# EAGLE board xmega-128a4u-switch (EAGLE 8.3.2)
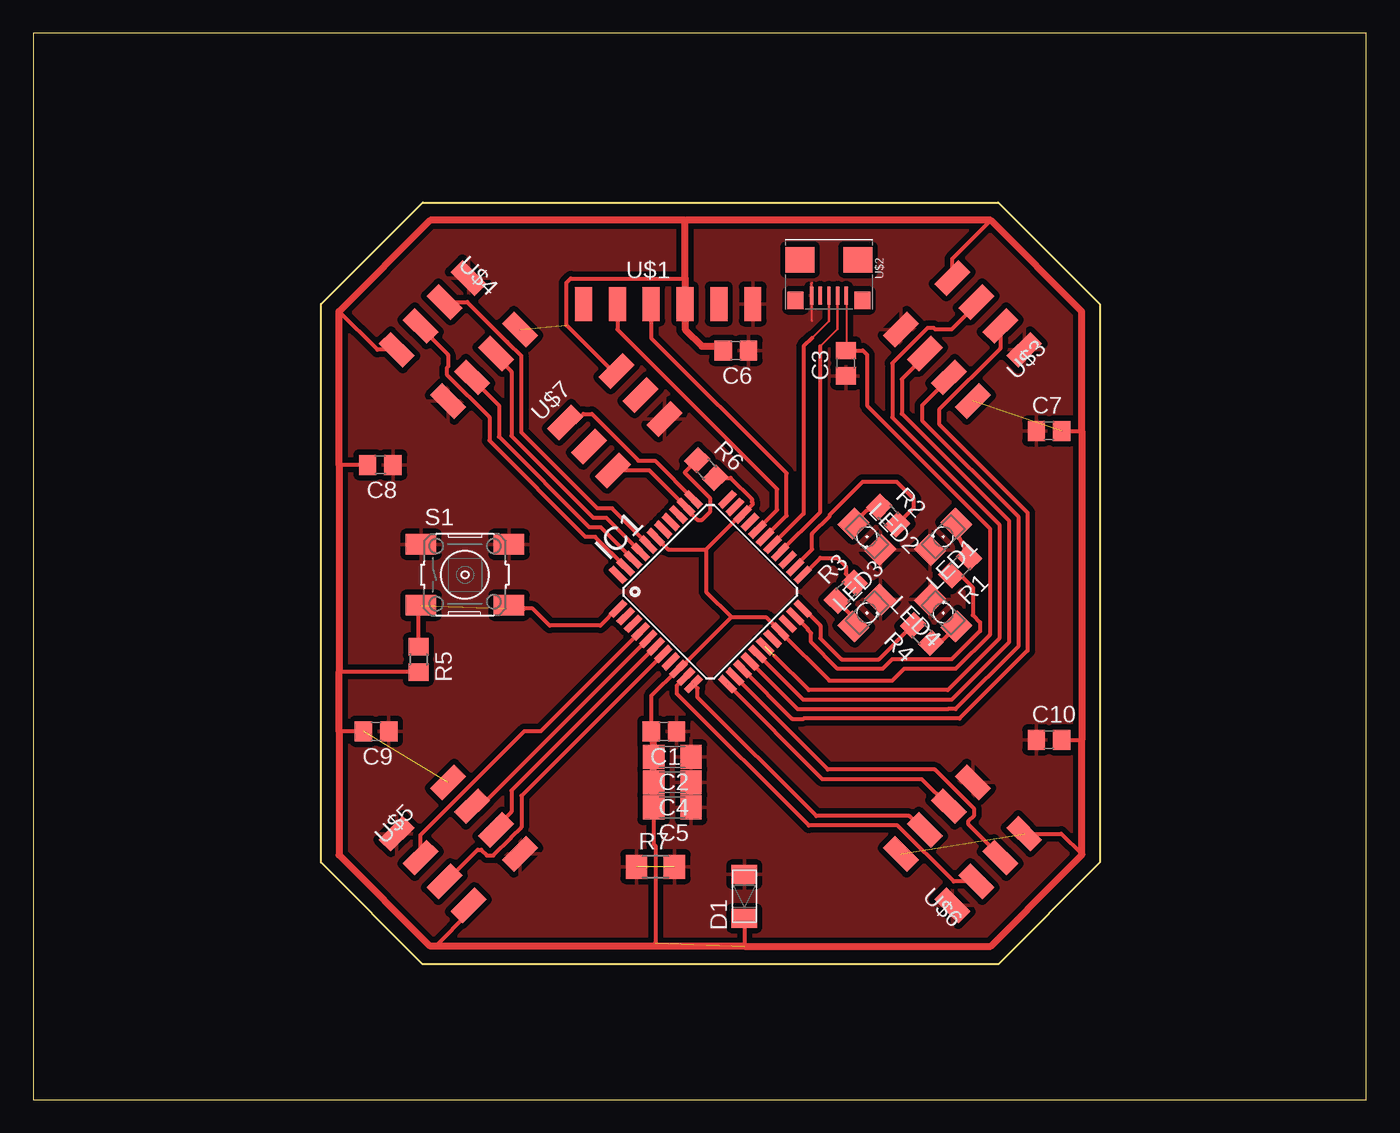
[diagram p0: board, top side]
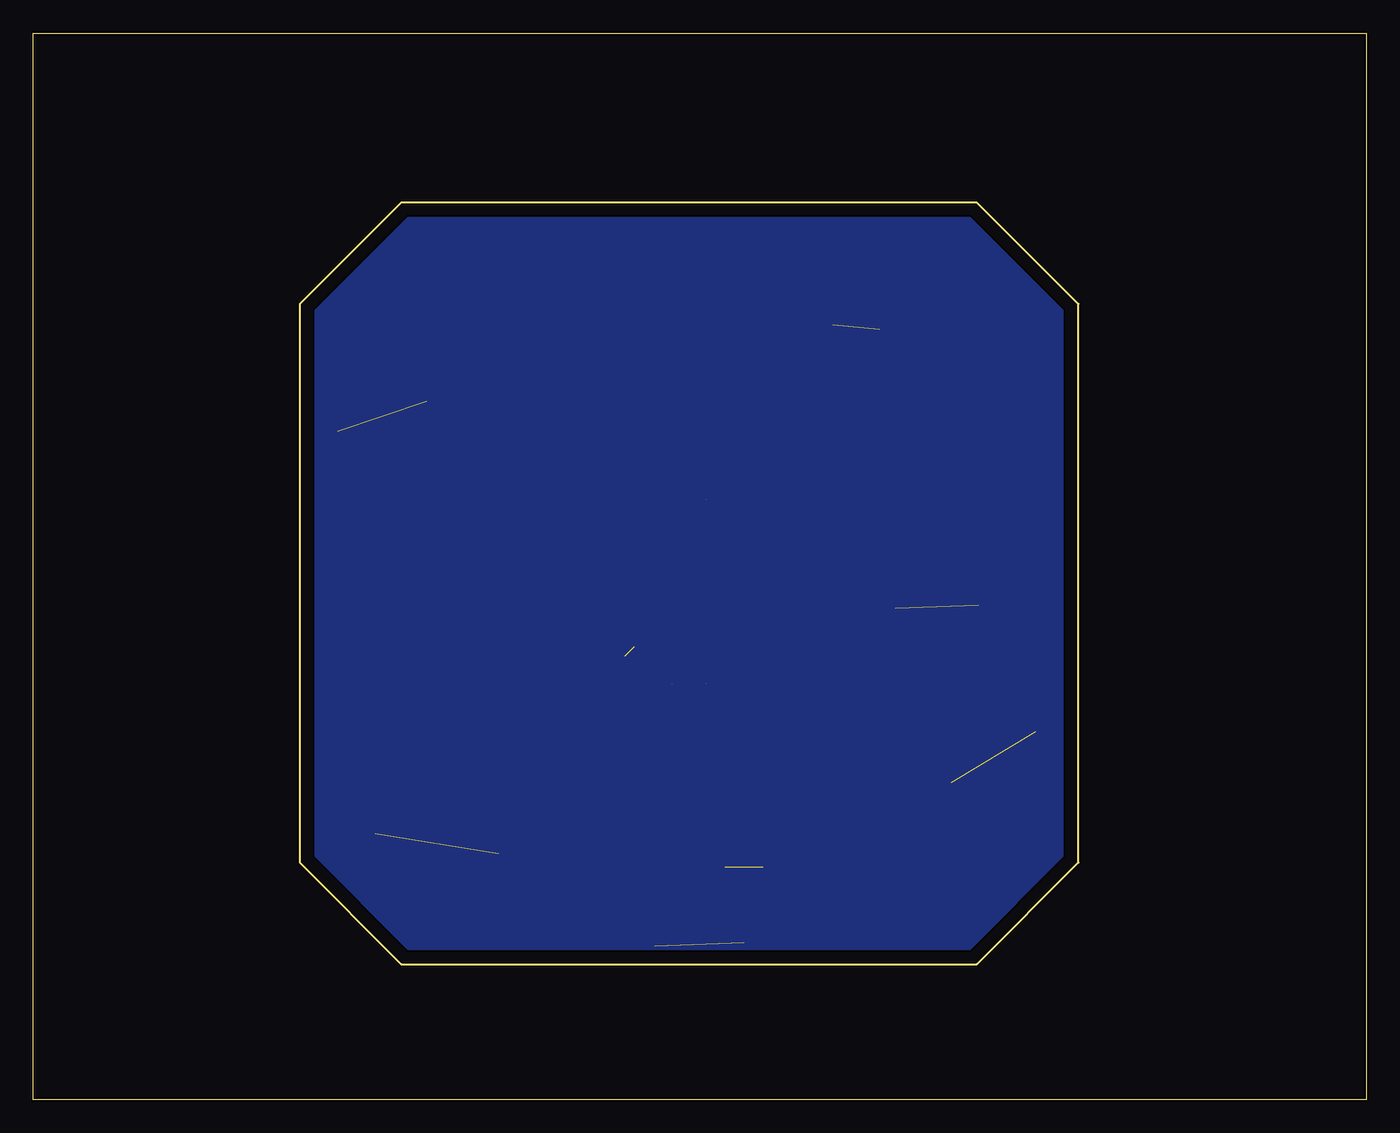
[diagram p1: board, bottom side, seen from below]

Size 100 x 80 mm. Coordinates in mm from the lower left corner, seen from the top.
Outline: 0,0 100,0 100,80 0,80 0,0
Outline: 21.59,59.69 29.21,67.31 72.39,67.31 80.01,59.69 80.01,17.78 72.39,10.16 29.21,10.16 21.59,17.78 21.59,59.69
Copper layers (1*16): Top 0.035mm / dielectric 1.5mm / Bottom 0.035mm
Design rules "default *": minimum track width 10mil, minimum drill 32mil, track to track 16mil, track to pad 16mil, pad to pad 16mil, via to via 16mil, smd to smd 16mil, copper to edge 40mil, drill to drill 16mil, minimum pad ring 10mil, minimum via ring 8mil, stop-mask expansion 4mil, vias tented up to drill 0mil, thermal gap 16mil

## Footprints (pad centres in the part's own frame; a part is rotated, then mirrored left to right if it is on the bottom)
C0805 = smd 1.3 x 1.5: 1 -0.95,0; 2 0.95,0
C1206 = smd 1.6 x 1.8: 1 -1.4,0; 2 1.4,0
MINI-SMA = smd 1.4 x 1.9: ANODE 1.65,0; KATHODE -1.65,0
TQFP44 = smd 1.5 x 0.5: 1 -5.8,4; 2 -5.8,3.2; 3 -5.8,2.4; 4 -5.8,1.6; 5 -5.8,0.8; 6 -5.8,0; 7 -5.8,-0.8; 8 -5.8,-1.6; 9 -5.8,-2.4; 10 -5.8,-3.2; 11 -5.8,-4; 23 5.8,-4; 24 5.8,-3.2; 25 5.8,-2.4; 26 5.8,-1.6; 27 5.8,-0.8; 28 5.8,0; 29 5.8,0.8; 30 5.8,1.6; 31 5.8,2.4; 32 5.8,3.2; 33 5.8,4 | smd 0.5 x 1.5: 12 -4,-5.8; 13 -3.2,-5.8; 14 -2.4,-5.8; 15 -1.6,-5.8; 16 -0.8,-5.8; 17 0,-5.8; 18 0.8,-5.8; 19 1.6,-5.8; 20 2.4,-5.8; 21 3.2,-5.8; 22 4,-5.8; 34 4,5.8; 35 3.2,5.8; 36 2.4,5.8; 37 1.6,5.8; 38 0.8,5.8; 39 0,5.8; 40 -0.8,5.8; 41 -1.6,5.8; 42 -2.4,5.8; 43 -3.2,5.8; 44 -4,5.8
LED_1206 = smd 1.6 x 1.803: A -1.422,0; C 1.422,0
R0805 = smd 1.3 x 1.5: 1 -0.95,0; 2 0.95,0
R1206 = smd 1.6 x 1.803: 1 -1.422,0; 2 1.422,0
6MM_SWITCH = smd 2.286 x 1.524: 1 -3.302,2.286; 2 3.302,2.286; 3 -3.302,-2.286; 4 3.302,-2.286
1X06SMD = smd 2.54 x 1.27: 1 0,6.35; 2 0,3.81; 3 0,1.27; 4 0,-1.27; 5 0,-3.81; 6 0,-6.35
DX4R005HJ5_64 = smd 0.254 x 1.35: D+ 0,1.6; D- -0.65,1.6; GND 1.3,1.6; ID 0.65,1.6; VBUS -1.3,1.6 | smd 1.2 x 1.3: GND@1 -2.5,1.95; GND@2 2.5,1.95 | smd 2.15 x 1.9: GND@3 -2.175,-1.1; GND@4 2.175,-1.1
2X04SMD = smd 2.54 x 1.27: 1 -2.54,3.81; 2 2.92,3.81; 3 -2.54,1.27; 4 2.92,1.27; 5 -2.54,-1.27; 6 2.92,-1.27; 7 -2.54,-3.81; 8 2.92,-3.81
2X03SMD = smd 2.54 x 1.27: 1 -2.54,2.54; 2 2.92,2.54; 3 -2.54,0; 4 2.92,0; 5 -2.54,-2.54; 6 2.92,-2.54

## Placement (x,y rotation side)
C1  0.1uF  [C0805]  47.31,27.62 180 top
C2  10uF  [C1206]  47.94,25.72 180 top
C3  1uF  [C0805]  60.96,55.24 90 top
C4  10uF  [C1206]  47.94,23.81 180 top
C5  10uF  [C1206]  47.94,21.91 180 top
C6  1uF  [C0805]  52.7,56.2 180 top
C7  1uF  [C0805]  76.2,50.16 0 top
C8  1uF  [C0805]  26.04,47.62 180 top
C9  1uF  [C0805]  25.72,27.62 180 top
C10  1uF  [C0805]  76.2,26.99 0 top
D1  CDBM1100-G  [MINI-SMA]  53.34,15.24 90 top
IC1  XMEGA16A4A  [TQFP44]  50.8,38.1 45 top
LED1  [LED_1206]  68.26,42.23 225 top
LED2  [LED_1206]  62.55,42.23 315 top
LED3  [LED_1206]  62.55,36.51 45 top
LED4  [LED_1206]  68.26,36.51 135 top
R1  2k2  [R0805]  69.53,40.01 225 top
R2  2k2  [R0805]  64.14,43.81 315 top
R3  2k2  [R0805]  60.96,38.1 45 top
R4  2k2  [R0805]  66.67,34.92 135 top
R5  15k  [R0805]  28.89,33.02 270 top
R6  15k  [R0805]  50.48,47.31 315 top
R7  0R  [R1206]  46.67,17.46 0 top
S1  [6MM_SWITCH]  32.38,39.37 0 top
U$1  FTDI-SMD-HEADER  [1X06SMD]  47.62,59.69 270 top
U$2  MICRO-USB_1/64  [DX4R005HJ5_64]  59.69,61.91 180 top
U$3  NETPORT_IDC_FULLFLIP  [2X04SMD]  69.85,57.15 225 top
U$4  NETPORT_IDC_FULLFLIP  [2X04SMD]  31.75,57.15 315 top
U$5  NETPORT_IDC_FULLFLIP  [2X04SMD]  31.75,19.05 45 top
U$6  NETPORT_IDC_FULLFLIP  [2X04SMD]  69.85,19.05 135 top
U$7  PDI  [2X03SMD]  43.5,50.8 45 top

## Library data of the parts
C1-C10 = eagle-ltspice; SPICEMODEL: NONE; SPICEPREFIX: C
D1 S1 U$1-U$7 = fab
IC1 = atmel; OC_FARNELL: unknown; OC_NEWARK: unknown
LED1-LED4 = eagle-ltspice; SPICEMODEL: NONE; SPICEPREFIX: D; SPICETYPE: diode
R1-R7 = eagle-ltspice; SPICEMODEL: NONE; SPICEPREFIX: R

## Nets
+3V3: C1.2 C2.2 C3.2 C4.2 C5.2 C6.2 C7.2 C8.2 C9.2 C10.2 D1.KATHODE IC1.9 IC1.19 IC1.31 IC1.39 R5.2 R6.2 U$1.3 U$2.VBUS U$3.2 U$3.7 U$4.2 U$4.7 U$5.2 U$5.7 U$6.2 U$6.7 U$7.2
D+: IC1.27 U$2.D+
D-: IC1.26 U$2.D-
GND: C1.1 C2.1 C3.1 C4.1 C5.1 C6.1 C7.1 C8.1 C9.1 C10.1 D1.ANODE IC1.8 IC1.18 IC1.30 IC1.38 LED1.C LED2.C LED3.C LED4.C R7.1 R7.2 S1.1 S1.2 U$1.1 U$2.GND U$3.1 U$3.8 U$4.1 U$4.8 U$5.1 U$5.8 U$6.1 U$6.8 U$7.6
N$1: LED4.A R4.1
N$2: LED3.A R3.1
N$3: LED2.A R2.1
N$4: LED1.A R1.1
N$5: IC1.35 R6.1 U$7.5
N$6: IC1.34 U$7.1
N$7: IC1.1 R5.1 S1.3 S1.4
NP1_STAT: IC1.21 R1.2
NP1BI: IC1.14 U$3.3
NP1BO: IC1.16 U$3.6
NP1TI: IC1.17 U$3.5
NP1TO: IC1.15 U$3.4
NP2_STAT: IC1.24 R2.2
NP2BI: IC1.40 U$4.3
NP2BO: IC1.42 U$4.6
NP2TI: IC1.43 U$4.5
NP2TO: IC1.41 U$4.4
NP3_STAT: IC1.23 R3.2
NP3BI: IC1.4 U$5.3
NP3BO: IC1.6 U$5.6
NP3TI: IC1.7 U$5.5
NP3TO: IC1.5 U$5.4
NP4_STAT: IC1.22 R4.2
NP4BI: IC1.10 U$6.3
NP4BO: IC1.12 U$6.6
NP4TI: IC1.13 U$6.5
NP4TO: IC1.11 U$6.4
RX: IC1.28 U$1.4
TX: IC1.29 U$1.5

## Tracks (layer width: path | path; a pad name or v marks a point on that pad's centre or on a via)
+3V3  (5 unrouted)
  Top 0.152: U$2.VBUS 60.99,56.23 C3.2
  Top 0.305: C1.2 46.36,30.26 IC1.9 48.49,32.3 52.39,36.2 | 52.39,36.2 54.97,36.2 IC1.19 59.73,31.43 64.45,31.43 65.33,32.31 69.19,32.31 71.75,34.87 71.75,42.86 62.55,52.07 62.55,55.88 62.23,56.2 C3.2 | 50.48,41.27 53.11,43.9 IC1.31 53.98,44.67 53.98,44.77 53.9,44.84 53.9,45.05 52.32,46.64 R6.2 | 50.48,41.27 47.62,41.27 IC1.39 | 50.48,41.27 50.48,38.1 52.39,36.2 | R5.2 22.94,32.07 | 48.9,61.59 40.32,61.59 40.01,61.28 40.01,58.1 43.45,54.66 U$7.2 | C10.2 78.66,26.99 | U$6.7 77.13,19.95 78.66,18.41 | U$3.7 68.95,63.09 71.83,65.96 | U$4.7 25.82,56.25 22.94,59.13 | C8.2 22.94,47.62 | U$5.7 32.65,13.99 30.16,11.51 | C9.2 22.94,27.62 | C7.2 78.66,50.16 | C5.2 46.54,19.18 46.67,19.05 46.67,11.77 | D1.KATHODE 53.34,11.51
  Top 0.508: 48.97,65.96 71.83,65.96 78.66,59.13 78.66,50.16 78.66,26.99 78.66,18.41 78.66,18.34 74.61,14.29 71.83,11.51 53.34,11.51 30.16,11.51 29.77,11.51 22.94,18.34 22.94,27.62 22.94,32.07 22.94,47.62 22.94,59.13 29.77,65.96 48.9,65.96 48.9,61.59 U$1.3 48.9,57.78 50.16,56.52 51.44,56.52 C6.2 | C5.2 C4.2 C2.2 46.54,27.44 C1.2
D+
  Top 0.203: U$2.D+ 59.69,58.42 58.42,57.15
  Top 0.305: 58.42,57.15 57.78,56.52 57.78,43.95 IC1.27
D-
  Top 0.203: U$2.D- 60.34,57.8 59.05,56.52
  Top 0.305: 59.05,56.52 59.05,44.09 IC1.26
GND  (1 unrouted)
  Top 0.152: U$2.GND 58.39,60.3 58.42,60.33 | U$2.GND 58.39,58.45 58.42,58.42 | U$2.GND 58.39,61.25 58.42,61.28
  pour Top (isolate 0.406): 21.59,59.69 29.21,67.31 72.39,67.31 80.01,59.69 80.01,17.78 72.39,10.16 29.21,10.16 21.59,17.78
N$1
  Top 0.305: R4.1 68.33,34.57 LED4.A
N$2
  Top 0.305: LED3.A 61.54,36.17 R3.1
N$3
  Top 0.305: R2.1 62.48,44.17 LED2.A
N$4
  Top 0.305: LED1.A 69.27,42.56 R1.1
N$5
  Top 0.305: R6.1 48.9,47.06 48.9,46.99 50.8,45.09 50.8,44.13 50.16,43.5 49.85,43.5 48.96,44.38 IC1.35 46.22,47.21 U$7.5
N$6  (1 unrouted)
  Top 0.305: U$7.1 40.64,50.8 41.27,51.44 41.91,51.44 45.4,47.94 46.63,47.94 IC1.34
N$7  (1 unrouted)
  Top 0.305: IC1.1 43.81,36.83 42.55,35.56 38.73,35.56 37.47,36.83 36.83,36.83 36.2,37.47 36.07,37.47 S1.4 35.31,36.83 | R5.1 28.89,36.89 S1.3
N$8
  pour Bottom: 21.59,59.69 29.21,67.31 72.39,67.31 80.01,59.69 80.01,17.78 72.39,10.16 29.21,10.16 21.59,17.78
NP1_STAT
  Top 0.305: R1.2 68.86,40.04 70.48,38.42 70.48,36.35 71.03,35.81 71.03,35.15 68.9,33.02 64.43,33.02 63.72,32.31 60.35,32.31 58.34,34.31 58.34,35 58.1,35.24 58.1,35.32 IC1.21
NP1BI
  Top 0.305: U$3.3 72.54,56.35 67.94,51.75 67.94,50.7 74.6,44.04 74.6,33.69 69.49,28.59 57.8,28.59 57.78,28.57 56.93,28.57 IC1.14
NP1BO
  Top 0.305: U$3.6 66.89,55.77 65.16,54.05 65.16,51.47 73.18,43.45 73.18,34.28 68.91,30.01 57.76,30.01 IC1.16
NP1TI  (1 unrouted)
  Top 0.305: 55.6,33.3 58.18,30.72 68.61,30.72 72.47,34.58 72.47,43.16 64.45,51.17 64.45,55.24 67.1,57.89 67.57,57.89 67.67,57.78 68.9,57.78 70.75,59.64 U$3.5
NP1TO
  Top 0.305: U$3.4 68.68,54.08 66.67,52.07 66.67,50.96 73.89,43.75 73.89,33.99 69.2,29.3 68.61,29.3 | 68.61,29.3 | 68.61,29.3 57.34,29.3 IC1.15
NP2_STAT
  Top 0.305: IC1.24 57.16,40.02 58.42,41.27 58.42,42.45 59.77,43.8 59.77,43.89 62.23,46.35 64.77,46.35 66.04,45.09 66.04,44.38 R2.2
NP2BI
  Top 0.305: U$4.3 32.55,59.84 35.56,56.83 35.56,56.82 36.62,55.77 36.62,50.06 42.33,44.35 43.42,44.35 IC1.40
NP2BO
  Top 0.305: U$4.6 32.92,54.08 34.92,52.07 34.92,49.74 41.74,42.93 42.58,42.93 IC1.42
NP2TI
  Top 0.305: IC1.43 42.16,42.22 41.44,42.22 34.21,49.45 34.21,51.19 31.01,54.4 31.01,54.87 31.11,54.97 31.11,55.88 29.06,57.94 U$4.5
NP2TO
  Top 0.305: U$4.4 34.71,55.77 35.88,54.61 35.88,49.79 42.03,43.64 43,43.64 IC1.41
NP3_STAT
  Top 0.305: IC1.23 57.79,39.37 59.05,40.64 60.33,40.64 60.96,40.01 60.96,39.44 R3.2
NP3BI
  Top 0.305: U$5.3 29.06,19.85 36.83,27.62 38.06,27.62 IC1.4
NP3BO
  Top 0.305: U$5.6 34.71,20.43 35.88,21.59 35.88,23.18 IC1.6
NP3TI
  Top 0.305: IC1.7 36.62,22.79 36.62,20.43 35.88,19.69 35.88,19.68 34.5,18.31 34.03,18.31 33.61,18.73 33.34,18.73 30.96,16.36 U$5.5
NP3TO
  Top 0.305: U$5.4 33.58,22.01 IC1.5
NP4_STAT
  Top 0.305: IC1.22 57.79,36.83 59.05,35.56 59.05,34.61 60.64,33.02 63.43,33.02 R4.2
NP4BI
  Top 0.305: U$6.3 69.05,16.36 64.85,20.56 58.18,20.56 48.26,30.48 48.26,31.04 | 48.26,31.04 | IC1.10 48.26,31.04
NP4BO  (1 unrouted)
  Top 0.305: IC1.12 59.18,24.05 66.64,24.05 U$6.6
NP4TI
  Top 0.305: IC1.13 59.61,24.77 67.63,24.77 70.59,21.8 70.59,21.33 70.17,20.91 70.17,20.64 72.54,18.26 U$6.5 71.75,18.94
NP4TO  (1 unrouted)
  Top 0.305: U$6.4 66.78,20.22 65.72,21.27 58.74,21.27 49.85,30.16 49.85,30.85 IC1.11
RX
  Top 0.305: U$1.4 46.35,57.15 56.52,46.99 56.52,43.81 IC1.28
TX
  Top 0.305: U$1.5 43.81,57.78 55.8,45.8 55.8,44.23 IC1.29